# Altium PCB plc_module_xs.00001.001.PcbDoc (part 1 of 2)
Units mm, origin at the board's own origin, x right, y up, seen from the top; angles counter-clockwise.
Board outline 39 x 110 mm, 2 copper layers (Top Layer, Bottom Layer), stack 1.06 mm thick; 80 components, 57 nets, 253 pads, 58 vias.
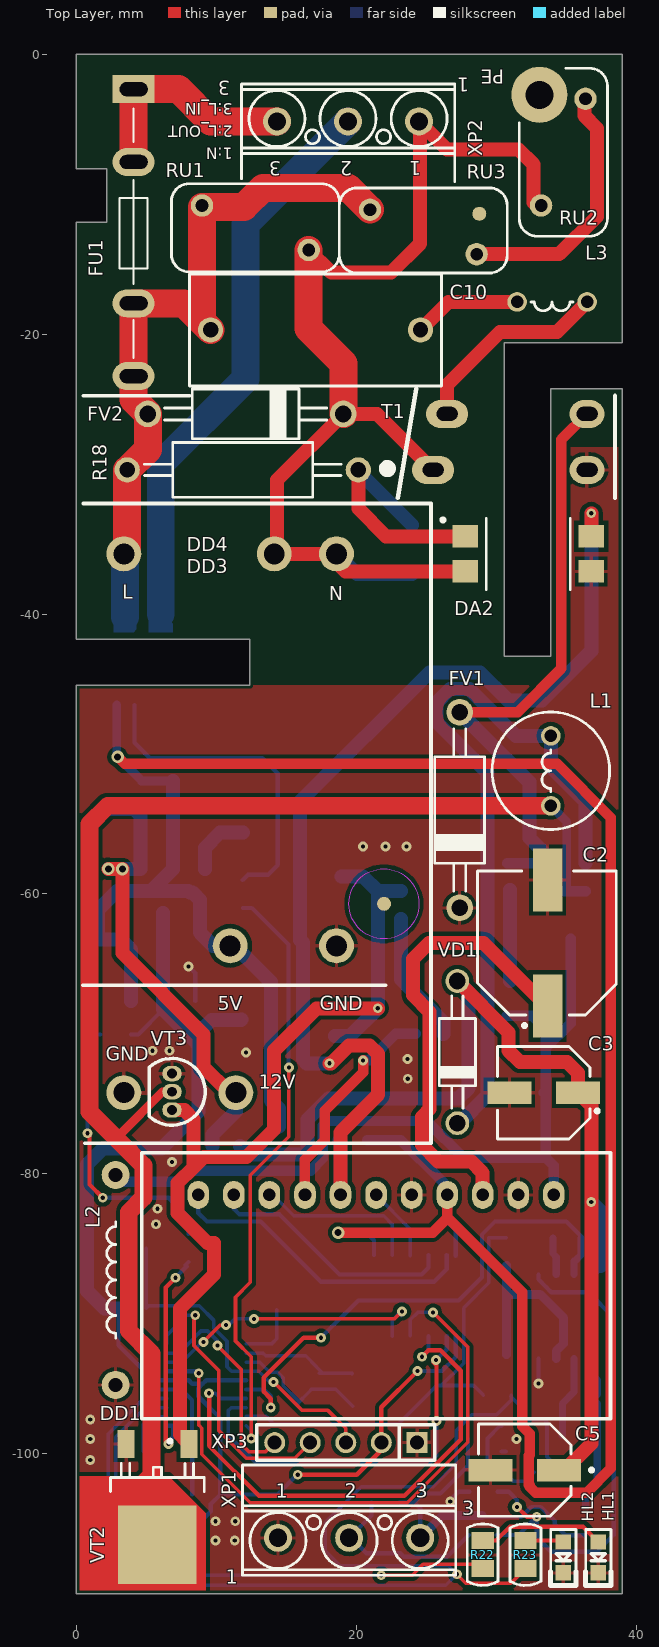
[diagram p0: Top Layer view]
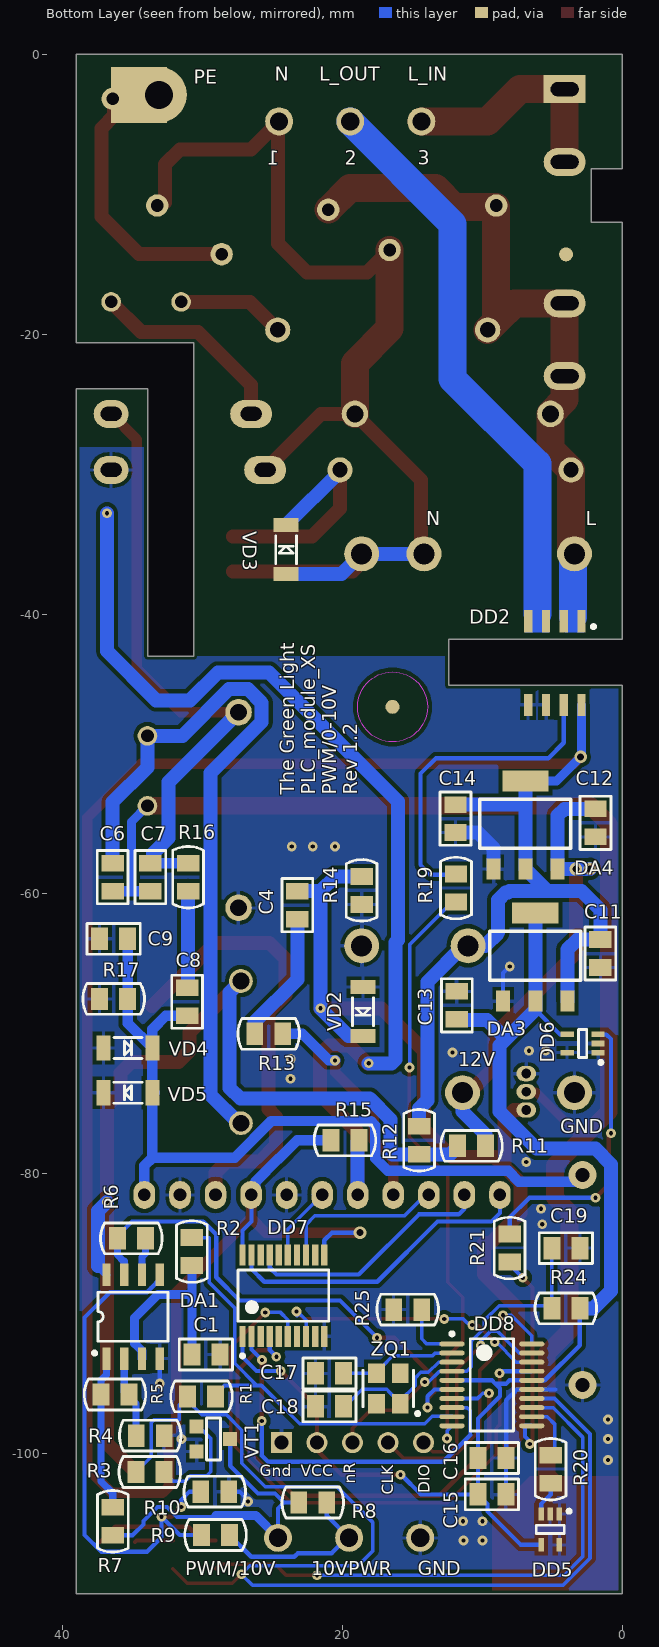
[diagram p1: Bottom Layer view, seen from below]
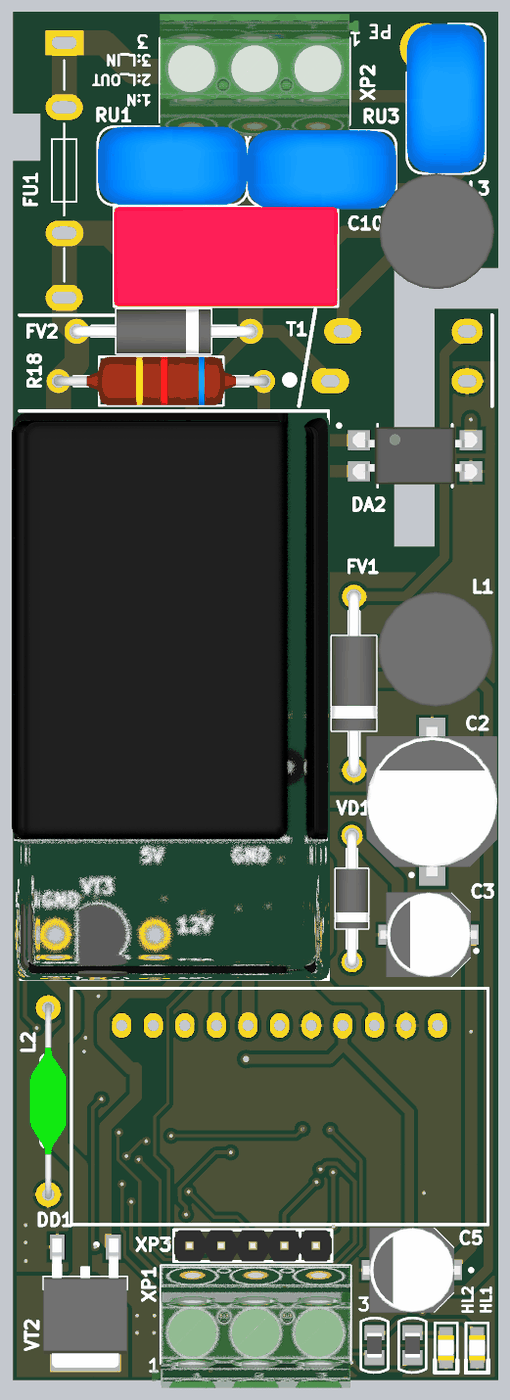
[diagram p2: 3D render of the assembled board from above, using the file's embedded part models]
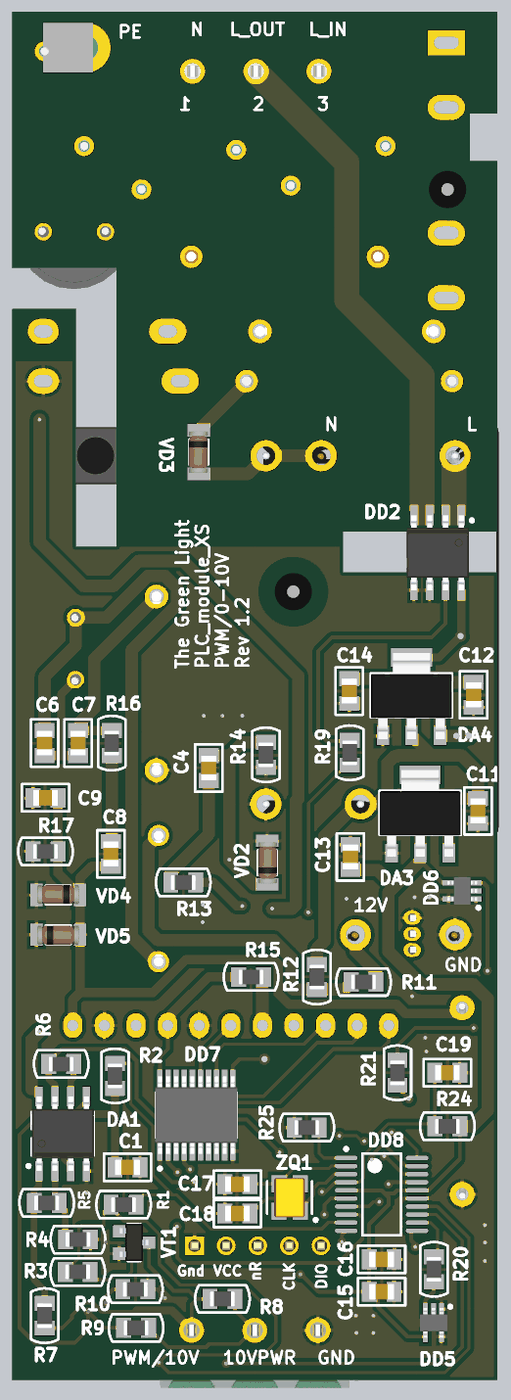
[diagram p3: 3D render of the assembled board from below, using the file's embedded part models]

## Layer stack, top to bottom
Top Solder: solder mask 0.01, Solder Resist, Dk 3.5
Top Layer: signal copper 0.03
Dielectric1: core 1, FR-4, Dk 4.2
Bottom Layer: signal copper 0.03
Bottom Solder: solder mask 0.01, Solder Resist, Dk 3.5

## Board outline
0,-110 0,-45.083 12.4,-45.083 12.4,-41.8 0,-41.8 0,-12 2.2,-12 2.2,-8.2 0,-8.2 0,0 39,0 39,-20.6 30.6,-20.6 30.6,-43 33.9,-43 33.9,-23.9 39,-23.9 39,-44.9 39,-110

## Design rules (kind name [scope] priority, off if disabled: settings)
BoardOutlineClearance [All] p1: gap=0.254 ignorepadtopadclearanceinfootprint=FALSE
Clearance Poly [InPolygon] p1: gap=0.3 ignorepadtopadclearanceinfootprint=FALSE
Clearance Clearance_1 [All] p2: gap=0.2 ignorepadtopadclearanceinfootprint=FALSE
Clearance [InNamedPolygon('Top Layer-No Net')] p3: gap=0.2 ignorepadtopadclearanceinfootprint=FALSE
Clearance All [Net And Not InPoly] p4: gap=0.2 ignorepadtopadclearanceinfootprint=FALSE
ComponentClearance ComponentClearance_1 [(InComponent('P1') OR InComponent('P2') OR InComponent('P3') OR InComponent('J1')) vs (InComponent('P1') OR InComponent('P2') OR InComponent('P3') OR InComponent('J1'))] p1: gap=0 collisioncheckmode=3 verticalgap=0 showdistances=FALSE
Height [All] p1: minheight=0 maxheight=40 prefheight=12.7
HoleSize [All] p1: absolutevalues=TRUE maxlimit=6 minlimit=0.3 maxpercent=80.000 minpercent=20.000
MinimumAnnularRing [All] p1: minimumring=0.2
MinimumSolderMaskSliver [All] p1: minsoldermaskwidth=0.1
PlaneClearance [All] p1: clearance=0.75
PlaneConnect [All] p1: pad.planeconnectstyle=Relief pad.reliefexpansion=0.508 pad.reliefentries=4 pad.reliefconductorwidth=0.254 pad.reliefairgap=0.2 via.planeconnectstyle=Direct via.reliefexpansion=0.508 via.reliefentries=4 via.reliefconductorwidth=0.254 via.reliefairgap=0.2
PolygonConnect [All] p1: thpad.connectstyle=Relief thpad.reliefconductorwidth=0.254 thpad.reliefentries=4 thpad.polygonreliefangle="90 Angle" thpad.airgapwidth=0.254 smdpad.connectstyle=Relief smdpad.reliefconductorwidth=0.254 smdpad.reliefentries=4 smdpad.polygonreliefangle="90 Angle" smdpad.airgapwidth=0.254 via.connectstyle=Direct via.reliefconductorwidth=0.254 via.reliefentries=4 via.polygonreliefangle="90 Angle" via.airgapwidth=0.254
RoutingTopology [All] p1: topology=Daisy_Balanced
RoutingVias [All] p1: holewidth=0.3 width=0.7 viastyle="Through Hole" minholewidth=0.3 minwidth=0.7 maxholewidth=2 maxwidth=3
SilkToSilkClearance [All] p1: silktosilkclearance=0.2
SilkToSolderMaskClearance [IsPad] p1: minsilkscreentomaskgap=0.1 clearancetoexposedcopper=TRUE
SolderMaskExpansion [All] p1: expansion=0.05
Width [All] p1: maxlimit=4 minlimit=0.125 preferedwidth=0.254
21 further rules are at their usual default settings.

## Components (designator, comment, footprint, x,y, rotation, side; value= is the part's Value field where it differs from the comment)
C1 "1uF" C0805 29.734,-92.9 r0 bottom
C2 "EEEFK1E471P" CAPAE1030X1020N 33.678,-63.5 r90 top value=470uF
C3 "EEEFK1E470P" CAPAE660X540N 33.4,-74.2 r180 top value=47uF
C4 "330nF" C0805 23.2,-60.8 r90 bottom
C5 "EEEFK1E470P" CAPAE660X540N 32.05,-101.16 r180 top value=47uF
C6 "39nF" C0805 36.4,-58.8 r90 bottom
C7 "330nF" C0805 33.7,-58.8 r90 bottom
C8 "1500pF" C0805 31.069,-67.7 r270 bottom
C9 "4700pF" C0805 36.326,-63.2 r0 bottom
C10 "B32652A104J" CAPR1500-800X1800X1500 17.1,-19.7 r180 top value=100nF
C11 "22uF" C0805 1.555,-64.254 r90 bottom
C12 "22uF" C0805 1.9,-54.918 r90 bottom
C13 "10uF" C0805 11.809,-67.954 r270 bottom
C14 "10uF" C0805 11.9,-54.618 r90 bottom
C15 "0.1uF" C0805 9.3,-102.9 r180 bottom
C16 "0.1uF" C0805 9.3,-100.3 r0 bottom
C17 "12pF" C0805 20.9,-94.255 r180 bottom
C18 "12pF" C0805 20.9,-96.611 r180 bottom
C19 "0.1uF" C0805 4.015,-85.3 r0 bottom
DA1 "LM258DR" SOIC-8 34.934,-90.2 r180 bottom
DA2 "FOD817BS" SMD-4 32.3,-35.7 r270 top
DA3 "LM1117-Series" SOT-223 6.2,-64.4 r180 bottom value=LM1117MPX-3.3
DA4 "LM1117-Series" SOT-223 6.9,-54.968 r180 bottom value=LM1117MPX-5.0
DD1 "KQ-330F" KQ-330F 21.425,-81.5 r180 top
DD2 "ACS723LLCTR-05AB-T" SOIC-8 4.8,-43.5 r0 bottom
DD3 "IRM-05-12" IRM-05-12 -0.05,-32.1 r90 top locked
DD4 "IRM-02-5" IRM-02-5 -0.1,-32.85 r90 top locked
DD5 "LMT84DCKT" SOT65P210X110-5N 5.133,-105.4 r270 bottom
DD6 "LMT84DCKT" SOT65P210X110-5N 2.822,-70.681 r0 bottom
DD7 "ST2378ETTR" SOP65P640X120-20N 24.2,-88.7 r90 bottom
DD8 "STM32F031F6P6TR" STM-TSSOP20_N 9.3,-95.073 r180 bottom
FU1 "Fuse" F-W20.0/E5.0 4.1,-13.5 r270 top value=FH-100
FV1 "P6KE24CA" DO-15 27.4,-54.001 r90 top
FV2 "P6KE440CA" DO-15 12.1,-25.7 r180 top
HL1 "KP-2012SURCK" LD0805 37.3,-107.4 r270 top
HL2 "DO NOT PLACE" LD0805 34.8,-107.4 r270 top value=KP-2012SGC
L1 "RLB0914-680KL" RLB0914_BOURNS 33.909,-51.2 r90 top value=68uH
L2 "EC24-221K" EC24 2.822,-87.573 r90 top value=220uH
L3 "RCH895NP-150K" RLB0914_BOURNS 34,-17.7 r180 top value=15uH
R1 "Resistor" R0805 30.045,-95.9 r0 bottom value=0
R2 "10k" R0805 30.734,-85.55 r90 bottom
R3 "Resistor" R0805 33.737,-101.3 r180 bottom value=0
R4 "10k" R0805 33.712,-98.7 r180 bottom
R5 "27k" R0805 36.229,-95.76 r0 bottom
R6 "100k" R0805 35.059,-84.6 r180 bottom
R7 "0" R0805 36.387,-104.821 r270 bottom
R8 "100k" R0805 22.1,-103.479 r180 bottom
R9 "270k" R0805 29.045,-105.8 r180 bottom
R10 "100k" R0805 29.1,-102.7 r0 bottom
R11 "0" R0805 10.755,-78 r0 bottom
R12 "0" R0805 14.499,-77.6 r270 bottom
R13 "27" R0805 25.247,-70 r0 bottom
R14 "2k" R0805 18.6,-59.743 r90 bottom
R15 "51k" R0805 19.8,-77.6 r0 bottom
R16 "270" R0805 31,-58.8 r90 bottom
R17 "2.7k" R0805 36.326,-67.5 r0 bottom
R18 "RSF200JB-73-220K" RES1651-1000X390 11.9,-29.7 r180 top value=220k
R19 "510" R0805 11.865,-59.577 r90 bottom
R20 "510" R0805 5.096,-101.1 r270 bottom
R21 "510" R0805 8.029,-85.3 r90 bottom
R22 "510" R0805 29.045,-107.2 r90 top
R23 "510" R0805 32.1,-107.2 r90 top
R24 "10k" R0805 4.015,-89.6 r0 bottom
R25 "1k" R0805 15.317,-89.7 r0 bottom
RU1 "B72210-S" VAR_EPCOS_B72210S0461K101 12.8,-12.4 r0 top value=S10K275
RU2 "B72210-S" VAR_EPCOS_B72210S0461K101 34.8,-7 r90 top value=S10K275
RU3 "B72210-S" VAR_EPCOS_B72210S0461K101 24.8,-12.7 r180 top value=S10K275
T1 "Coupling_Coil" KQ330COIL 31.5,-27.7 r180 top
VD1 "1N5819" DO-41 27.232,-71.3 r90 top
VD2 "LL4148" SOD-80 18.5,-68.408 r270 bottom
VD3 "LL4148" SOD-80 24,-35.4 r90 bottom
VD4 "LL4148" SOD-80 35.3,-71 r180 bottom
VD5 "LL4148" SOD-80 35.3,-74.2 r0 bottom
VT1 "BJT-NPN" SOT-23 29.2,-98.941 r270 bottom value=BC847
VT2 "MJD50T4G" DIODES-INC_TO-252-3L 5.8,-103.8 r270 top locked
VT3 "BJT-NPN" TO-92-D 7.244,-74.134 r90 top value=2SD667
XP1 "GND PWR CTRL" PHOENIX_1715734 19.5,-106 r0 top locked value=DG300-5.0-03P-12-00AH
XP2 "LIN LOUT N" PHOENIX_1715734 19.42,-4.8 r180 top value=DG128-5.0-03P-14-00AH
XP3 "SWD ОТЛАДКА" PLS-5 19.26,-99.2 r180 top value=PLS-5
ZQ1 "Crystal-1_3p" "SMD 3.2x2.5mm" 16.7,-95.329 r90 bottom value="KX-7 16.0MHz"

## Footprints (in the part's own frame and the unit in brackets; to place one, negate y for a bottom-side part, rotate by r counter-clockwise, add the part's x,y. Pads: shape width x height; smd on the part's side, far side on the other; paste and mask are expansions set on the pad)
C0805 [mm] "2012M"
  rect 1.2x1.6 smd: 1(-1,0) 2(1,0)
  silkscreen extent -1.9,-1.1 1.9,1.1, body extent -1,-0.62 1,0.63, height 1.01
CAPAE660X540N [mm] "Capacitor, Aluminium Electrolytric, 6.6mm L X 6.6mm W X 5.4mm H, IPC Medium Density"
  rect 3.15x1.6 smd: 1(-2.45,0) 2(2.45,0)
  silkscreen extent -3.95,-3.3 3.3,3.3, body extent -3.9,-3.4 3.9,3.4, height 5.7
CAPAE1030X1020N [mm] "Capacitor, Aluminium Electrolytric, 10.3mm L X 10.3mm W X 10.2mm H, IPC Medium Density"
  rect 4.5x2.1 smd: 1(-4.5,0) 2(4.5,0)
  silkscreen extent -6.02,-4.91 5.15,5, body extent -6,-5.25 6,5.25, height 10.2
CAPR1500-800X1800X1500 [mm] "Capacitor Radial, Pin spacing 15.0mm - Body With 8mm X Body Length 18mm X Body Height 15mm"
  round 1.8 hole 1.1: 1(-7.5,0) 2(7.5,0)
  silkscreen extent -9,-4 9,4, body extent -9,-4 9,4, height 15
DIODES-INC_TO-252-3L [mm] "DPAK TO-252, 2.28mm pitch; 2 pin, 9.7mm L X 6.7mm W X 2.40mm H body"
  rect 2x1.2 smd: 1(-4.5,2.25) 3(-4.5,-2.25)
  rect 5.6x5.6 smd: 2(2.7,0)
  silkscreen extent -4.82,-3.35 -1.1,3.35, body extent -5.2,-3.35 5.2,3.35, height 2.4
DO-15 [mm] "DO-15, Diode, Axial, Body 7.62 x 3.56mm (LxDia. Max), Pin spacing 13.97mm"
  round 1.9 hole 1.2: 1(-6.985,0) 2(6.985,0)
  silkscreen extent -5.8,-1.78 5.8,1.78, body extent -7.41,-1.78 7.42,1.78, height 3.56
DO-41 [mm] "DO-41, Diode, Axial, Body 4.7 x 2.7 mm (LxDia. max), Pin spacing 10.16mm"
  round 1.7 hole 1.2: 1(-5.08,0) 2(5.08,0)
  silkscreen extent -4,-1.3 4,1.3, body extent -5.48,-1.3 5.48,1.3, height 2.6
EC24 [mm]
  round 2 hole 1: 1(-7.5,0) 2(7.5,0)
  silkscreen extent -4.16,0 4.16,0.63, body extent -7.87,-1.5 7.87,1.5, height 3
F-W20.0/E5.0 [mm] "General Fuse Holder 5x20"
  rect 2x3 hole 1 slot 2 at 90 deg: 1(-11,0)
  oval 2x3 hole 1 slot 2 at 90 deg: 1(-5.8,0) 2(4.3,0) 2(9.5,0)
  silkscreen extent -9.6,-3.6 10.9,4
IRM-02-5 [mm] "MeanWell AC-DC 220 to 5V 2W (400mA)"
  round 2.5 hole 1.5: 1(-2.85,-18.7) 2(-2.85,-3.5) 3(-30.85,-11.1) 4(-30.85,-18.7)
  silkscreen extent -33.67,-22.23 -33.67,-0.58, body extent -33.7,-22.2 0,0, height 15
IRM-05-12 [mm] "MeanWell AC-DC 220 to 12V 5W (420mA)"
  round 2.5 hole 1.5: 1(-3.6,-14.2) 2(-3.6,-3.45) 3(-42.1,-11.45) 4(-42.1,-3.45)
  silkscreen extent -45.7,-25.4 0,-0.55, body extent -45.81,-25.51 -0.13,-0.13, height 21.5
KQ330COIL [mm] "KQ330COIL"
  oval 3x2 hole 1 slot 1.5 at 0 deg: 1(6,2) 2(5,-2)
  oval 2.5x2 hole 1 slot 1.5 at 0 deg: 3(-5,2) 4(-5,-2)
  silkscreen extent -7,-3.77 9.55,4, body extent -7.13,-3.75 7.38,3.75, height 15.95
KQ-330F [mm]
  oval 1.54x2 hole 0.9: 1(-12.7,0) 2(-10.16,0) 3(-7.62,0) 4(-5.08,0) 5(-2.54,0) 6(0,0) 7(2.54,0) 8(5.08,0) 9(7.62,0) 10(10.16,0) 11(12.7,0)
  silkscreen extent -16.75,-3 16.75,16, body extent -16.75,-3 16.75,16, height 13
LD0805 [mm]
  rect 1.1x1.1 smd: 1(-1.1,0) 2(1.1,0)
  silkscreen extent -2,-0.9 2,0.9, body extent -1,-0.62 1,0.63, height 0.73
PHOENIX_1715734 [mm] "Terminal Block, 17.5A 400V, Pitch 5.08mm, 3 Positions, Screw Connection"
  round 2 hole 1.3: 1(-5.08,0) 2(0,0) 3(5.08,0)
  silkscreen extent -7.62,-2.67 7.62,5.2, body extent -8.36,-4.6 7.62,5.2, height 14.19
PLS-5 [mm]
  rect 1.5x1.5 hole 1: 1(-5.08,0)
  round 1.5 hole 1: 2(-2.54,0) 3(0,0) 4(2.54,0) 5(5.08,0)
  silkscreen extent -6.35,-1.27 6.35,1.27, body extent -6.35,-1.27 6.35,1.27, height 8.9
R0805 [mm] "2012M"
  rect 1.2x1.6 smd: 1(-1,0) 2(1,0)
  silkscreen extent -2.2,-1.1 2.2,1.1, body extent -1,-0.6 1,0.6, height 0.5
RES1651-1000X390 [mm] "Resistor, Axial, Pad spacing 16.51mm - Body Lengh 10mm X Body Diameter 3.9mm"
  round 1.8 hole 1.1: 1(-8.255,0) 2(8.255,0)
  silkscreen extent -7.02,-1.95 7.02,1.95, body extent -8.64,-1.95 8.65,1.95, height 3.9
RLB0914_BOURNS [mm]
  round 1.4 hole 0.9: 1(-2.5,0) 2(2.5,0)
  silkscreen extent -4.2,-4.2 4.2,4.2, body extent -4.7,-4.7 4.6,4.6, height 10
"SMD 3.2x2.5mm" [mm]
  rect 1.4x1.2 smd paste+0: 1(-1.1,-0.85) 2(1.1,-0.85) 3(1.1,0.85) 4(-1.1,0.85)
  silkscreen extent -1.92,-2.22 1.3,1.8, body extent -1.6,-1.25 1.6,1.25, height 0.77
SMD-4 [mm]
  rect 1.6x1.8 smd: 1(-1.25,-4.5) 2(1.25,-4.5) 3(1.25,4.5) 4(-1.25,4.5)
  silkscreen extent -2.55,-6.22 2.54,3, body extent -2.29,-5 2.29,5, height 3.85
SOD-80 [mm]
  rect 1x1.8 smd: 1(-1.75,0) 2(1.75,0)
  silkscreen extent -1,-0.75 1,0.75, body extent -1.68,-0.74 1.68,0.8, height 1.52
SOIC-8 [mm] "4320.8-А Small Outline; 8 Leads; Body Width 3.9 mm; Pitch 1.27 mm"
  rect 0.6x1.6 smd: 1(-1.905,-3) 2(-0.635,-3) 3(0.635,-3) 4(1.905,-3) 5(1.905,3) 6(0.635,3) 7(-0.635,3) 8(-1.905,3)
  silkscreen extent -2.88,-2.72 2.5,1.75, body extent -2.5,-3.01 2.5,3.01, height 1.75
SOP65P640X120-20N [mm] "SOP, 20-Leads, Body 6.5x4.4mm, Pitch 0.65mm, IPC Medium Density"
  rect 1.5x0.45 smd: 1(-2.9,2.925) 2(-2.9,2.275) 3(-2.9,1.625) 4(-2.9,0.975) 5(-2.9,0.325) 6(-2.9,-0.325) 7(-2.9,-0.975) 8(-2.9,-1.625) 9(-2.9,-2.275) 10(-2.9,-2.925) 11(2.9,-2.925) 12(2.9,-2.275) 13(2.9,-1.625) 14(2.9,-0.975) 15(2.9,-0.325) 16(2.9,0.325) 17(2.9,0.975) 18(2.9,1.625) 19(2.9,2.275) 20(2.9,2.925)
  silkscreen extent -4.42,-3.25 1.83,3.25, body extent -3.12,-3.3 3.12,3.3, height 1.2
SOT65P210X110-5N [mm] "SOT353, SC70-5, SOT, 0.65mm Pitch, 5 pin, 1.25mm W X 2.00mm L X 1.10mm H, IPC Medium Density"
  rect 0.95x0.4 smd: 1(-1.1,0.65) 2(-1.1,0) 3(-1.1,-0.65) 4(1.1,-0.65) 5(1.1,0.65)
  silkscreen extent -1.42,-1 0.3,1.47, body extent -1.2,-1.1 1.2,1.1, height 1.1
SOT-23 [mm] "КТ-46"
  rect 1x1 smd: 1(-0.9,-1.2) 2(0,1.2) 3(0.9,-1.2)
  silkscreen extent -1.5,-0.5 1.5,0.5, body extent -1.5,-1.15 1.5,1.15, height 1.11
SOT-223 [mm]
  rect 1x1.5 smd: 1(-2.3,-3.25) 2(0,-3.25) 3(2.3,-3.25)
  rect 3.3x1.5 smd: 2(0,3.05)
  silkscreen extent -3.25,-1.75 3.25,1.75, body extent -3.25,-3.53 3.25,3.43, height 1.65
STM-TSSOP20_N [mm] "SOP, 20-Leads, Body 6.6x4.5mm, Pitch 0.65mm, IPC Medium Density"
  oval 1.8x0.35 smd: 1(-2.85,2.925) 2(-2.85,2.275) 3(-2.85,1.625) 4(-2.85,0.975) 5(-2.85,0.325) 6(-2.85,-0.325) 7(-2.85,-0.975) 8(-2.85,-1.625) 9(-2.85,-2.275) 10(-2.85,-2.925) 11(2.85,-2.925) 12(2.85,-2.275) 13(2.85,-1.625) 14(2.85,-0.975) 15(2.85,-0.325) 16(2.85,0.325) 17(2.85,0.975) 18(2.85,1.625) 19(2.85,2.275) 20(2.85,2.925)
  silkscreen extent -2.98,-3.3 1.55,3.77, body extent -2.25,-3.3 2.25,3.3, height 1.2
TO-92-D [mm]
  oval 1.1x1.4 hole 0.7: 1(-1.3,0.4) 2(0,0.4) 3(1.3,0.4)
  silkscreen extent -2.38,-1.97 2.38,2.02, body extent -2.4,-1.92 2.4,2.01, height 10
VAR_EPCOS_B72210S0461K101 [mm] "EPCOS S10K460 Metal Oxyde Varistor, Body 6.3X12mm"
  round 1.6 hole 0.9: 1(-3.81,1.587) 2(3.81,-1.587)
  silkscreen extent -6,-3.15 6,3.15, body extent -6,-3.15 6,3.15, height 15

## Part data
C1: library part GRM219R71E105KA88D, Dielectric Type=X7R, Manufacturer=Murata, Tolerance=±10%, Voltage=25V, Working Temperature Max=+125°С, Working Temperature Min=-55°С, Application Category=1, ID=229, Part Number=GRM219R71E105KA88D, Published=18.05.2010, Publisher="Andrew Danich", Type=Конденсатор
C2: Tolerance=20%, Voltage=25V, Distributor1=terraelectronica, Distributor2=chipdip, ESR=0.08ohm, ID=1, Part Number=EEEFK1E471P, Published=23.04.2010, Publisher="Andrew Danich", Type=Конденсатор, URL1="<div><a href=\"https://www.terraelectronica.ru/product/310291\">https://www.terraelectronica.ru/product/310291</a></div>", URL2=https://www.chipdip.ru/product1/8000425032
C3 C5: Manufacturer=PANASONIC, Tolerance=20%, Voltage=25V, Distributor1=terraelectronica, ID=4, Part Number=EEEFK1E470P, Published=23.04.2010, Publisher="Andrew Danich", Type=Конденсатор, URL1="<div><a href=\"https://www.terraelectronica.ru/product/577701\">https://www.terraelectronica.ru/product/577701</a></div>"
C4 C7: library part CC0805KKX7R9BB334, Dielectric Type=X7R, Manufacturer=Yageo, Tolerance=±10%, Voltage=50V, Working Temperature Max=+125°С, Working Temperature Min=-55°С, Application Category=1, Distributor1=Terraelectronica, ID=235, Part Number=CC0805KKX7R9BB334, Published=18.05.2010, Publisher="Andrew Danich", Type=Конденсатор, URL1="<div><a href=\"https://www.terraelectronica.ru/product/1078481\">https://www.terraelectronica.ru/product/1078481</a></div>"
C6: library part CC0805KRX7R9BB393, Dielectric Type=X7R, Manufacturer=Yageo, Tolerance=±5%, Voltage=50V, Working Temperature Max=+125°С, Working Temperature Min=-55°С, Application Category=1, Distributor1=Terraelectronica, ID=234, Part Number=CC0805KRX7R9BB393, Published=18.05.2010, Publisher="Andrew Danich", Type=Конденсатор, URL1="<div><a href=\"https://www.terraelectronica.ru/product/1080422\">https://www.terraelectronica.ru/product/1080422</a></div>"
C8: library part CC0805JRNPO9BN152, Dielectric Type=NP0, Manufacturer=Yageo, Tolerance=±5%, Voltage=50V, Working Temperature Max=+125°С, Working Temperature Min=-55°С, Application Category=1, Distributor1=Terraelectronica, ID=236, Part Number=CC0805JRNPO9BN152, Published=18.05.2010, Publisher="Andrew Danich", Type=Конденсатор
C9: library part CC0805JKNPO9BN472, Dielectric Type=NP0, Manufacturer=Murata, Tolerance=±5%, Voltage=50V, Working Temperature Max=+125°С, Working Temperature Min=-55°С, Application Category=1, ID=233, Part Number=CC0805JKNPO9BN472, Published=18.05.2010, Publisher="Andrew Danich", Type=Конденсатор
C10: Manufacturer="EPCOS AG", Tolerance=5%, Voltage=1000V, Distributor1=terraelectronica, Distributor2=chipdip, Functional Analog="К73-17 имп, 0.1 мкФ, 1000 В, 5%  B32652A0104J", ID=1, Part Number=B32652A104J, Published=18.05.2010, Publisher="Andrew Danich", Type=Конденсатор, URL1="<div><a href=\"https://www.terraelectronica.ru/product/608082\">https://www.terraelectronica.ru/product/608082</a></div>", URL2=https://www.chipdip.ru/product/b32652a0104j000
C11 C12: library part GRM21BR61E226ME44L, Dielectric Type=X5R, Manufacturer=Murata, Tolerance=±20%, Voltage=25V, ID=39, Part Number=GRM21BR61E226ME44L, Published=18.05.2010, Publisher="Andrew Danich", Type=Конденсатор
C13 C14: library part GRM21BR61E106KA73L, Dielectric Type=X5R, Manufacturer=Murata, Tolerance=±10%, Voltage=25V, ID=53, Part Number=GRM21BR61E106KA73L, Published=18.05.2010, Publisher="Andrew Danich", Type=Конденсатор
C15 C16 C19: library part GRM21BR71H104KA01L, Dielectric Type=X7R, Manufacturer=Murata, Tolerance=±10%, Voltage=50V, Working Temperature Max=+125°С, Working Temperature Min=-55°С, Application Category=1, ID=138, Part Number=GRM21BR71H104KA01L, Published=18.05.2010, Publisher="Andrew Danich", Type=Конденсатор
C17 C18: library part CC0805JRNPO9BN120, Dielectric Type=NP0, Manufacturer=Yageo, Tolerance=±5%, Voltage=50V, Working Temperature Max=+125°С, Working Temperature Min=-55°С, Application Category=1, Distributor1=Terraelectronica, ID=239, Part Number=CC0805JRNPO9BN120, Published=18.05.2010, Publisher="Andrew Danich", Type=Конденсатор
DA1: Supply Current=1.2mA, Bandwidth=0.7MHz, ID=65, Part Number=LM258DR, Published=08.12.2013, Publisher="Andrew Danich", Rail-to-Rail=-\-, Slew Rate=0.3V/µs, Supply Operation=+3…32V, Type=Микросхема
DA2: Current Transfer Ratio=50…600%, Cut-off Frequency=80kHz, Input Current=20mA, Input Voltage=1.2V, Output Current=50mA, Output Voltage=35V, Total Power Dissipation=150mW, Application Category=1, ID=15, Part Number=FOD817BS, Published=09.01.2017, Publisher="Andrew Danich", Type=Микросхема
DA3: library part LM1117MPX-3.3, Input Voltage=+8.5…20V, Output Current=800mA, Output Voltage=+3.3V, ID=9, Part Number=LM1117MPX-3.3, Published=13.08.2015, Publisher="Andrew Danich", Type=Микросхема
DA4: library part LM1117MPX-5.0, Input Voltage=+8.5…20V, Output Current=800mA, Output Voltage=+3.3V, Distributor1=terraelectronica, Distributor2=chipdip, ID=16, Part Number=LM1117MPX-5.0, Published=13.08.2015, Publisher="Andrew Danich", Type=Микросхема, URL1="<div><a href=\"https://www.terraelectronica.ru/product/133540\">https://www.terraelectronica.ru/product/133540</a></div>", URL2=https://www.chipdip.ru/product/lm1117mpx-5.0-nopb
DD1: Manufacturer=kq100.com, Application Type=Transceiver, Data Rate=1200bps, Distributor1=Alibaba, Distributor2=Taobao, Functional Analog=-, ID=1, Input Interface=UART, Input Speed=9600baud, Part Number=KQ-330F, Published=18.08.2014, Publisher="Andrew Danich", Type=Микросхема
DD3: Input Voltage=+12V, Manufacturer="Mean Well (MW)", Output Current=420mA, Power=5W, Working Temperature Max=+70C, Working Temperature Min=-30C, Distributor1=Terraelectronica, ID=2, Output Voltage=+12V, Part Number=IRM-05-12, URL1="<div><a href=\"https://www.terraelectronica.ru/product/1202359\">https://www.terraelectronica.ru/product/1202359</a></div>"
DD4: Manufacturer="Mean Well (MW)", Output Current=400mA, Output Voltage=+5V, Power=2W, Voltage Tolerance=±2,5%, Working Temperature Max=+70C, Working Temperature Min=-30C, Distributor1=Terraelectronica, ID=17, Part Number=IRM-02-5, URL1="<div><a href=\"https://www.terraelectronica.ru/product/2118699\">https://www.terraelectronica.ru/product/2118699</a></div>"
DD5 DD6: "LMT84/LMT84-Q1 1.5V, SC70/TO-92/TO-126,Analog Temperature Sensors with Class-AB Output", Manufacturer="Texas Instruments", Distributor1=terraelectronica, ID=9, Part Number=LMT84DCKT, URL1="<div><a href=\"https://www.terraelectronica.ru/product/1196420\">https://www.terraelectronica.ru/product/1196420</a></div>"
DD7: "8-bit dual supply 1.71 V to 5.5 V level translator with I/O VCC ±15 kV ESD protection", Input Voltage="1.7V to 5.5V", Manufacturer=STMicroelectronics, Distributor1=terraelectronica, ID=8, Part Number=ST2378ETTR, Published=18.08.2014, Publisher="Andrew Danich", Type=Микросхема, URL1="<div><a href=\"https://www.terraelectronica.ru/product/448973\">https://www.terraelectronica.ru/product/448973</a></div>"
DD8: Manufacturer=STMicroelectronics, Operation Frequency=48MHz, Working Temperature Max=+85°С, Working Temperature Min=-40°С, Application Category=1, Distributor1=Terraelectronica, Distributor2=ChipDip, EEPROM=-, Flash=32K, I/O Lines=15, ID=29, Part Number=STM32F031F6P6TR, Prog Interface=SWD, Published=27.07.2015, Publisher="Andrew Danich", SRAM=4K, Supply Operation=+2.4…3.6V, Type=Микросхема, URL1=https://www.terraelectronica.ru/product/2176678
FU1: library part FH-100, ID=17, Part Number=FH-100, Published=24.09.2010, Publisher="Andrew Danich", Type="Вставка плавкая"
FV1: "Suppressor-Bi", Reverse Current=100A, Reverse Voltage=20.5V, Total Power Dissipation=0, ID=1, Part Number=P6KE24CA, Published=27.07.2015, Publisher="Andrew Danich", Type=Супрессор
FV2: Reverse Current=100A, Reverse Voltage=376V, Total Power Dissipation=600W, Distributor1=Terraelectronica, Distributor2=ChipDip, Distributor3=Compel, ID=16, Part Number=P6KE440CA, Published=27.07.2015, Publisher="Andrew Danich", Type=Супрессор
HL1: Color=Red, Forward Current=30mA, Forward Voltage=2.5V, Manufacturer=Kingbright, Power Dissipation=75mW, Working Temperature Max=+85°С, Working Temperature Min=-40°С, Application Category=1, ID=23, Leds=1, Luminous Flux=150, Part Number=KP-2012SURCK, Published=03.12.2013, Publisher="Andrew Danich", Type="Индикатор единичный"
HL2: library part KP-2012SGC, Color=Green, Forward Current=25mA, Forward Voltage=2.5V, Manufacturer=Kingbright, Power Dissipation=62.5mW, Working Temperature Max=+85°С, Working Temperature Min=-40°С, Application Category=1, ID=21, Leds=1, Part Number=KP-2012SGC, Published=03.12.2013, Publisher="Andrew Danich", Type="Индикатор единичный"
L1: DC Resistance=0.2Ohm, Rated Current=1200mA, Self-Resonant Frequency=4.5MHz, Tolerance=10%, ID=9, Part Number=RLB0914-680KL, Published=20.05.2010, Publisher="Andrew Danich", Q=30, Type=Дроссель
L2: DC Resistance=5.7Ohm, Rated Current=130mA, Self-Resonant Frequency=4MHz, Tolerance=10%, Distributor1=ChipDip, ID=8, Part Number=EC24-221K, Published=20.05.2010, Publisher="Andrew Danich", Q=60, Type=Дроссель, URL1="<div><a href=\"https://www.chipdip.ru/product/ec24-221k\">https://www.chipdip.ru/product/ec24-221k</a></div>"
L3: DC Resistance=0.05Ohm, Rated Current=1.8A, Tolerance=10%, Distributor2=terraelectronica, ID=11, Part Number=RCH895NP-150K, Published=20.05.2010, Publisher="Andrew Danich", Type=Дроссель, URL2=https://www.terraelectronica.ru/product/213295
R1 R3 R11 R12: library part RC0805JR-070RL, Limit Voltage=150V, Manufacturer=Yageo, Temperature Coefficient=100ppm, Tolerance=±5%, Total Power Dissipation=0.125W, Working Temperature Max=+155°С, Working Temperature Min=-55°С, Application Category=1, ID=421, Part Number=RC0805JR-070RL, Published=24.03.2010, Publisher="Andrew Danich", Series Type=Thick-Film, Type=Резистор
R2 R4 R24: library part RC0805JR-0710KL, Limit Voltage=150V, Manufacturer=Yageo, Temperature Coefficient=100ppm, Tolerance=±5%, Total Power Dissipation=0.125W, Working Temperature Max=+155°С, Working Temperature Min=-55°С, Application Category=1, ID=99, Part Number=RC0805JR-0710KL, Published=24.03.2010, Publisher="Andrew Danich", Series Type=Thick-Film, Type=Резистор
R5: library part RC0805JR-0727KL, Limit Voltage=150V, Manufacturer=Yageo, Temperature Coefficient=100ppm, Tolerance=±5%, Total Power Dissipation=0.125W, Working Temperature Max=+155°С, Working Temperature Min=-55°С, Application Category=1, ID=127, Part Number=RC0805JR-0727KL, Published=24.03.2010, Publisher="Andrew Danich", Series Type=Thick-Film, Type=Резистор
R6 R8 R10: library part RC0805JR-07100KL, Limit Voltage=150V, Manufacturer=Yageo, Temperature Coefficient=100ppm, Tolerance=±5%, Total Power Dissipation=0.125W, Working Temperature Max=+155°С, Working Temperature Min=-55°С, Application Category=1, ID=98, Part Number=RC0805JR-07100KL, Published=24.03.2010, Publisher="Andrew Danich", Series Type=Thick-Film, Type=Резистор
R7: library part RC0805JR-0727RL, Limit Voltage=150V, Manufacturer=Yageo, Part Number=RC0805JR-070RL, Temperature Coefficient=100ppm, Tolerance=±5%, Total Power Dissipation=0.125W, Working Temperature Max=+155°С, Working Temperature Min=-55°С, Application Category=1, ID=125, Published=24.03.2010, Publisher="Andrew Danich", Series Type=Thick-Film, Type=Резистор
R9: library part RC0805JR-07270KL, Limit Voltage=150V, Manufacturer=Yageo, Temperature Coefficient=100ppm, Tolerance=±5%, Total Power Dissipation=0.125W, Working Temperature Max=+155°С, Working Temperature Min=-55°С, Application Category=1, ID=126, Part Number=RC0805JR-07270KL, Published=24.03.2010, Publisher="Andrew Danich", Series Type=Thick-Film, Type=Резистор
R13: library part RC0805JR-0727RL, Limit Voltage=150V, Manufacturer=Yageo, Temperature Coefficient=100ppm, Tolerance=±5%, Total Power Dissipation=0.125W, Working Temperature Max=+155°С, Working Temperature Min=-55°С, Application Category=1, ID=125, Part Number=RC0805JR-0727RL, Published=24.03.2010, Publisher="Andrew Danich", Series Type=Thick-Film, Type=Резистор
R14: library part RC0805JR-072KL, Limit Voltage=150V, Manufacturer=Yageo, Temperature Coefficient=100ppm, Tolerance=±5%, Total Power Dissipation=0.125W, Working Temperature Max=+155°С, Working Temperature Min=-55°С, Application Category=1, ID=129, Part Number=RC0805JR-072KL, Published=24.03.2010, Publisher="Andrew Danich", Series Type=Thick-Film, Type=Резистор
R15: library part RC0805JR-0751KL, Limit Voltage=150V, Manufacturer=Yageo, Temperature Coefficient=100ppm, Tolerance=±5%, Total Power Dissipation=0.125W, Working Temperature Max=+155°С, Working Temperature Min=-55°С, Application Category=1, ID=154, Part Number=RC0805JR-0751KL, Published=24.03.2010, Publisher="Andrew Danich", Series Type=Thick-Film, Type=Резистор
R16: library part RC0805JR-07270RL, Limit Voltage=150V, Manufacturer=Yageo, Temperature Coefficient=100ppm, Tolerance=±5%, Total Power Dissipation=0.125W, Working Temperature Max=+155°С, Working Temperature Min=-55°С, Application Category=1, ID=446, Part Number=RC0805JR-07270RL, Published=24.03.2010, Publisher="Andrew Danich", Series Type=Thick-Film, Type=Резистор
R17: library part RC0805JR-072K7L, Limit Voltage=150V, Manufacturer=Yageo, Temperature Coefficient=100ppm, Tolerance=±5%, Total Power Dissipation=0.125W, Working Temperature Max=+155°С, Working Temperature Min=-55°С, Application Category=1, Distributor1=Terraelectronica, Distributor2=ChipDip, ID=442, Part Number=RC0805JR-072K7L, Published=24.03.2010, Publisher="Andrew Danich", Series Type=Thick-Film, Type=Резистор, URL1="<div><a href=\"https://www.terraelectronica.ru/product/558399\">https://www.terraelectronica.ru/product/558399</a></div>", URL2=https://www.chipdip.ru/product0/8715864745
R18: Limit Voltage=500V, Tolerance=5%, Total Power Dissipation=1W, Distributor1=chipdip, ID=3, Part Number=RSF200JB-73-220K, Published=19.09.2014, Publisher="Andrew Danich", Series Type=CF-100, Type=Резистор
R19 R20 R21 R22 R23: library part RC0805JR-07510RL, Limit Voltage=150V, Manufacturer=Yageo, Temperature Coefficient=100ppm, Tolerance=±5%, Total Power Dissipation=0.125W, Working Temperature Max=+155°С, Working Temperature Min=-55°С, Application Category=1, ID=153, Part Number=RC0805JR-07510RL, Published=24.03.2010, Publisher="Andrew Danich", Series Type=Thick-Film, Type=Резистор
R25: library part RC0805JR-071KL, Limit Voltage=150V, Manufacturer=Yageo, Temperature Coefficient=100ppm, Tolerance=±5%, Total Power Dissipation=0.125W, Working Temperature Max=+155°С, Working Temperature Min=-55°С, Application Category=1, ID=112, Part Number=RC0805JR-071KL, Published=24.03.2010, Publisher="Andrew Danich", Series Type=Thick-Film, Type=Резистор
RU1 RU2 RU3: library part "B72210-S 271-K101", "B72210-S 271-K101", Max Continuous voltage (RMS)=275V, Max non-repetitve surge current=2500A, Varistor voltage at 1mA=430V, Absorption energy=43J, Distributor1=chipdip, Distributor2=terraelectronica, ID=4, Part Number="B72210-S 271-K101", URL1="<div><a href=\"https://www.chipdip.ru/product/b72210-s271-k101\">https://www.chipdip.ru/product/b72210-s271-k101</a></div>"
T1: library part KQ330_Coupling_Coil, "Power Line Communication Coupling Transformer", Published=06.04.2010, Publisher="Viktor Klishin", Type=Трансформатор
VD1: Forward Current=1A, Forward Voltage=0.55V, Manufacturer="ST Microelectronics", Reverse Current=0.5mA, Reverse Voltage=50V, Application Category=1, Distributor1=terraelectronica, Distributor2=chipdip, ID=1, Part Number=1N5819, Published=18.05.2010, Publisher="Andrew Danich", Type=Диод, URL1="<div><a href=\"https://www.terraelectronica.ru/product/343651\">https://www.terraelectronica.ru/product/343651</a></div>", URL2=https://www.chipdip.ru/product/1n5819-2
VD2 VD3 VD4 VD5: Capacitance=4pF, Forward Current=200mA, Forward Voltage=1V, Reverse Current=3uA, Reverse Voltage=100V, Total Power Dissipation=0.5W, ID=1, Part Number=LL4148, Published=18.05.2010, Publisher="Andrew Danich", Recovery Time=4nS, Type=Диод
VT1: library part BC847, C-E Saturation Voltage=0.6V, C-E Voltage=45V, Collector Current=100mA, DC Current Gain=110…800, Total Power Dissipation=250mW, Transition Frequency=100MHz, ID=1, Part Number=BC847, Published=07.05.2013, Publisher="Andrew Danich", Type=Транзистор
VT2: "BJT-NPN", C-E Saturation Voltage=1.0V, C-E Voltage=40V, Collector Current=1A, DC Current Gain=10…150, Total Power Dissipation=1.56W, Transition Frequency=10MHz, Distributor1=Terraelectronica, Distributor2=ChipDip, ID=19, Part Number=MJD50T4G, Published=07.05.2013, Publisher="Andrew Danich", Type=Транзистор, URL1="<div><a href=\"https://www.terraelectronica.ru/product/259312\">https://www.terraelectronica.ru/product/259312</a></div>", URL2=https://www.chipdip.ru/product1/8861890713
VT3: library part 2SD667, C-E Saturation Voltage=1V, C-E Voltage=80V, Collector Current=1A, DC Current Gain=30…320, Manufacturer=HITACHI, Total Power Dissipation=900mW, Transition Frequency=140MHz, Working Temperature Max=+150°С, Working Temperature Min=-55°С, ID=1, Part Number=2SD667, Published=07.05.2013, Publisher="Andrew Danich", Type=Транзистор
XP1: library part DG300-5.0-03P-12-00AH, Limit Current=10A, Limit Voltage=300V, Resistance=20mohm, Working Temperature Max=+105°С, Working Temperature Min=-40°С, Connector Type=Female, Distributor1=terraelectronica, ID=97, Part Number=DG300-5.0-03P-12-00AH, Pins=3, Pitch=5mm, Published=07.03.2013, Publisher="Andrew Danich", Type=Вилка, URL1="<div><a href=\"https://www.terraelectronica.ru/product/988120\">https://www.terraelectronica.ru/product/988120</a></div>"
XP2: library part DG128-5.0-03P-14-00AH, Limit Current=10A, Limit Voltage=300V, Resistance=20mohm, Working Temperature Max=+105°С, Working Temperature Min=-40°С, Connector Type=Female, ID=96, Part Number=DG128-5.0-03P-14-00AH, Pins=2, Pitch=5mm, Published=07.03.2013, Publisher="Andrew Danich", Type=Вилка
XP3: library part PLS-5, Limit Current=3A, Limit Voltage=250V, Resistance=15momh, Connector Type=Male, ID=4, Part Number=PLS-5, Pins=5, Pitch=2.54mm, Published=07.03.2013, Publisher="Andrew Danich", Surface Finish=Gold, Type=Вилка
ZQ1: library part "KX-7 16.0MHz", Load Capacitance=10pF, Manufacturer="GEYER ELECTRONIC", Output Frequency=16МГц, Temperature Coefficient=±30ppm, Working Temperature Max=+70°С, Working Temperature Min=-20°С, Application Category=1, Distributor1=terraelectronica, Functional Analog=-, ID=27, Part Number="KX-7 16.0MHz", Published=12.09.2014, Publisher="Andrew Danich", Type=Резонатор, URL1="<div><a href=\"https://www.terraelectronica.ru/product/165772\">https://www.terraelectronica.ru/product/165772</a></div>"
DD2: ID=6, Part Number=ACS723LLCTR-05AB-T, Published=13.08.2015, Publisher="Andrew Danich", Type=Микросхема

## Free pads (board coordinates)
  round 1 smd far side mask+1: 6(4,-14.3) 6(16.401,-46.627)
  round 1 smd mask+1: 6(22,-60.7) 6(28.8,-11.4)
  round 4 hole 2: 8(33.095,-2.9)
  rect 4x4 smd far side: 9(34.5,-2.9)

## Via types
v1: diameter 0.7, hole 0.3, Top Layer to Bottom Layer, tented both sides, 54 vias
v2: diameter 0.9, hole 0.5, Top Layer to Bottom Layer, tented both sides, 4 vias

## Nets (pads, with @x,y where several pads share a name; then routed paths per layer and width w, separated by ;. In a path a pad name is that pad's centre, name@x,y a point inside that pad or via, vN(x,y) a via of type N, cw(c..) or ccw(c..) an arc to the next point about the centre after c; other vN are vias at no path point)
G: pad.8 pad.9 RU2.2 RU3.1 | length 18.7
  Top Layer w1: RU3.1 34.512,-14.287 37.203,-11.597 37.203,-5.298 36.3,-4.395 RU2.2@36.3,-2.99
GL: DA2.4 DD1.7 R15.1 | length 78.3
  Top Layer w1: v1(18.1,-72.1) 18.193,-72.1 19.482,-70.811 20.947,-70.811 21.58,-71.444 21.58,-74.33 18.885,-77.025 DD1.7 ; DA2.4 v1(36.8,-32.8)
  Bottom Layer w1: v1(18.1,-72.1) 16.468,-72.1 16.2,-71.832 16.2,-63.473 16,-63.273 16,-53.4 25.234,-44.166 28.866,-44.166 30.859,-46.159 33.286,-46.159 36.8,-42.645 v1(36.8,-32.8) ; R15.1 18.885,-77.685 DD1.7
GND: C1.1 C2.2 C3.2 C5.2 C9.2 C11.1 C12.1 C13.1 C14.1 C15.2 C16.1 C17.1 C18.1 C19.1 DA1.4 DA2.3 DA3.1 DA4.1 DD1.2 DD1.5 DD2.5 DD2.6 DD3.4 DD4.4 DD5.1 DD5.2 DD5.5 DD6.1 DD6.2 DD6.5 DD7.10 DD8.15 FV1.1 HL1.2 HL2.2 L2.1 R4.2 R10.1 R14.1 R17.2 R25.2 T1.3 VD2.1 VD4.1 VD5.2 VT1.3 VT2.3 VT3.3 XP1.1 XP3.1 | length 21.7
  Bottom Layer w0.305: 4.769,-95.398 DD8.15 7.511,-95.398 8.279,-96.166 8.279,-100.279 C16.1 C15.2 ; v1(8.029,-65.182) 8.5,-65.654 DA3.1 ; v1(26.722,-103.4) 26.722,-103.31 27.333,-102.7 R10.1 ; VT1.3 VT1.3@30.686,-99.841 ; v1(33.029,-94.971) DA1.4
  Bottom Layer w1: DA4.1 9.2,-56.7 10.282,-55.618 C14.1
  other v1: 9.961,-106.2 11.329,-106.2 9.961,-104.821 11.366,-104.821 1.01,-100.431 1,-98.941 31.467,-98.943 1,-97.541 5.705,-83.59 5.8,-82.486 6.844,-79.146 23.681,-73.2 23.67,-71.8 12.123,-71.318 5.456,-71.2 6.656,-71.2 20.5,-56.6 22.1,-56.6 23.6,-56.6
NetC1_2: C1.2 DA1.3 R2.1 | length 14.3
  Bottom Layer w0.635: C1.2 30.734,-88.61 ; R2.1 30.734,-88.61 ; DA1.3 34.299,-92.638 34.822,-92.115 34.822,-90.283 33.149,-88.61 30.734,-88.61
NetC2_1: C2.1 DD1.3 | length 32.6
  Top Layer w1: DD1.3 29.045,-79.917 28.228,-79.1 25.867,-79.1 24.712,-77.946 24.712,-75.919 25.257,-75.374 25.257,-68.421 24.057,-67.221 24.057,-64.636 25.194,-63.5 29.098,-63.5 C2.1@33.598,-68
NetC4_1: C4.1 R13.2 | length 9.5
  Bottom Layer w1: C4.1 23.2,-66.1 26.247,-69.147 R13.2
NetC4_2: C4.2 R14.2 VD2.2 VT2.1 VT3.1 | length 66.4
  Top Layer w1: VT3.1 7.72,-75.434 8.383,-76.096 8.383,-79.533 ; VT2.1 7.655,-98.905 7.655,-98.863 7.419,-98.626 7.419,-89.619 9.857,-87.181 9.857,-84.94 9.389,-84.94 7.25,-82.802 7.25,-80.659 8.376,-79.533 8.383,-79.533 ; 8.244,-79.672 8.383,-79.533 ; v1(21.546,-68.171) 17.171,-68.171 14.142,-71.2 14.142,-72.837 14.147,-72.842 14.147,-76.815 12.162,-78.8 9.116,-78.8 8.383,-79.533
  Bottom Layer w1: VD2.2 19.558,-70.158 v1(21.546,-68.171) 21.546,-59.8 ; R14.2@18.957,-58.743 20.489,-58.743 21.546,-59.8 ; C4.2 21.546,-59.8
NetC6_1: C6.1 C7.1 L1.1 VT2.2 VT3.2 | length 104.4
  Top Layer w0.635: 3.1,-77.7 3.1,-77.2 6.166,-74.134 VT3.2 ; 3.595,-78.195 4.083,-78.195
  Top Layer w1.27: VT2.2 4.1,-104.8 4.1,-102.824 5.384,-101.541 5.384,-92.833 3.756,-91.205 3.756,-82.736 4.8,-81.692 4.8,-79.4 3.595,-78.195 3.1,-77.7 0.951,-75.551 0.951,-55.006 2.257,-53.7 L1.1
  Bottom Layer w0.635: L1.1 35.05,-54.841 35.05,-59.8
  Bottom Layer w0.75: C7.1@33.5,-59.8 C7.1 35.05,-59.8 C6.1
NetC6_2: C6.2 L1.2 VD1.1 | length 52.5
  Bottom Layer w1: VD1.1@27.373,-76.38 29.4,-74.353 29.4,-51.35 26.722,-48.671 26.714,-48.671 25.745,-47.702 25.745,-46.338 26.717,-45.366 28.083,-45.366 31.417,-48.7 L1.2 33.909,-50.953 36.4,-53.444 C6.2
NetC7_2: C7.2 FV1.2 R16.2 T1.4 | length 43.5
  Top Layer w0.75: FV1.2 31.543,-47.016 34.67,-43.889 34.67,-27.53 T1.4
  Bottom Layer w0.75: R16.2@30.8,-57.8 R16.2 C7.2@33.5,-57.8
  Bottom Layer w1: FV1.2 32.4,-52.016 32.4,-56 33.5,-57.1 C7.2@33.5,-57.8
NetC8_1: C8.1 R16.1 | length 6.5
  Bottom Layer w1: C8.1@31,-66.2 R16.1@31,-59.7
NetC8_2: C8.2 C9.1 DD1.1 L2.2 R17.1 VD4.2 VD5.1 | length 60.4
  Bottom Layer w0.75: L2.2@2.432,-80.073 2.9,-79.605 2.9,-80.545 7.371,-80.545 8.136,-79.78 16.74,-79.78 17.625,-78.895 17.625,-78.645 17.62,-78.64 17.62,-76.56 17.96,-76.22 25.05,-76.22 27.68,-78.85 33.55,-78.85 ; C8.2@30.773,-68.7 C8.2 32.6,-68.7 33.55,-69.65 VD4.2 ; VD5.1@33.4,-74.2 33.55,-74.05 VD4.2 ; VD5.1 33.55,-78.85 ; DD1.1 34.125,-79.425 33.55,-78.85 ; C9.1 R17.1 35.326,-69.224 VD4.2
NetC10_1: C10.1 L3.2 | length 7.7
  Top Layer w1: C10.1 26.6,-17.7 L3.2
NetC10_2: C10.2 DD2.1 DD2.2 DD3.2 DD4.2 FU1.2 FV2.2 R18.2 RU1.1 RU3.2 | length 51.1
  Top Layer w2: DD4.2@3.5,-35.9 3.562,-35.796 3.645,-35.655 R18.2 5.115,-28.23 FV2.2 4.1,-24.685 4.1,-23 4.1,-17.8 7.7,-17.8 C10.2@8.99,-19.09 ; C10.2 C10.2@8.99,-19.09 ; RU3.2 19.44,-9.563 13.337,-9.563 12,-10.9 8.99,-10.9 C10.2@8.99,-19.09
  Bottom Layer w2: 3.5,-40.2 DD4.2@3.5,-35.9
NetC17_2: C17.2 DD8.2 ZQ1.3 | length 8.4
  Bottom Layer w0.254: DD8.2 13.34,-92.798 13.542,-93 16.39,-93 16.782,-93.392 16.782,-93.399 ZQ1.3@17.581,-94.198 ; ZQ1.3@17.372,-94.229 ZQ1.3 19.675,-94.229 C17.2@19.707,-94.261
NetC18_2: C18.2 DD8.3 ZQ1.1 | length 10.2
  Bottom Layer w0.254: DD8.3 13.106,-93.448 13.838,-94.18 14.382,-94.18 14.782,-94.579 14.782,-95.124 15.85,-96.192 ZQ1.1@15.85,-96.367 ; ZQ1.1 ZQ1.1@15.85,-96.367 ; C18.2@19.769,-96.611 18.555,-95.397 16.812,-95.397 16.618,-95.592 16.618,-95.599 ZQ1.1@15.85,-96.367
NetC19_2: C19.2 DD8.4 R24.2 XP3.3 | length 24.7
  Top Layer w0.254: v1(14.1,-94.862) 16.138,-96.9 17.985,-96.9 19.26,-98.175 XP3.3
  Bottom Layer w0.254: C19.2 R24.2 5.197,-89.418 8.782,-89.418 9.843,-90.478 9.843,-91.036 10.773,-91.967 10.773,-93.773 11.098,-94.098 DD8.4 13.038,-94.098 13.802,-94.862 v1(14.1,-94.862)
NetDA1_1: DA1.1 R5.2 R7.1 | length 10.5
  Bottom Layer w0.508: R7.1 36.387,-102.812 37.229,-101.971 R5.2@37.229,-96.396 ; DA1.1 36.839,-94.355 37.229,-94.746 R5.2
NetDA1_2: DA1.2 R4.1 R5.1 | length 5.9
  Bottom Layer w0.508: R4.1 34.734,-98.678 34.734,-96.4 35.569,-95.565 DA1.2
NetDA1_5: DA1.5 R9.1 R10.2 | length 37.5
  Top Layer w0.305: v1(31.5,-103.8) 32.2,-104.5 v1(32.9,-104.5)
  Bottom Layer w0.305: R9.1 31.6,-105.8 v1(32.9,-104.5) 32.9,-105.954 33.946,-107 37.2,-107 38.4,-105.8 38.4,-90.266 36.584,-88.45 33.943,-88.45 33.641,-88.148 33.641,-88.141 33.029,-87.528 DA1.5 ; R10.2 30.9,-102.7 31.5,-103.3 v1(31.5,-103.8)
NetDA1_6: DA1.6 R6.2 | length 2.7
  Bottom Layer w0.508: R6.2 34.059,-85.694 34.299,-85.934 DA1.6
NetDA1_7: DA1.7 DD8.6 R6.1 | length 37.5
  Top Layer w0.305: v1(13.9,-96.7) 13.9,-96.06 13.398,-95.558 13.398,-95.16 13.393,-95.155 13.393,-94.569 16.261,-91.7 v1(17.5,-91.7)
  Bottom Layer w0.305: DD8.6 13.408,-95.398 13.9,-95.89 v1(13.9,-96.7) ; v1(17.5,-91.7) 20.15,-89.05 27.327,-89.05 28.995,-87.382 28.995,-84.327 29.922,-83.4 35.015,-83.4 R6.1@36.125,-84.51
  Bottom Layer w0.508: DA1.7 35.569,-86.242 35.611,-86.2 35.655,-86.2 36.059,-85.796 R6.1
NetDA2_1: DA2.1 R18.1 VD3.2 | length 16.8
  Top Layer w1: R18.1 20.155,-32.455 22.15,-34.45 DA2.1
  Bottom Layer w1: R18.1 20.155,-29.805 VD3.2
NetDA2_2: DA2.2 DD3.1 DD4.1 FV2.1 RU1.2 RU2.1 T1.1 VD3.1 XP2.1 | length 87.6
  Top Layer w1: RU1.2 18.222,-15.6 22.5,-15.6 24.58,-13.52 24.58,-5.08 24.5,-5 XP2.1 26.5,-6.8 31.6,-6.8 32.662,-7.862 RU2.1@32.662,-10.61 ; T1.1 21.5,-25.7 FV2.1 14.35,-30.435 14.35,-35.7 18,-35.7 19.25,-36.95 DA2.2
  Top Layer w2: RU1.2 16.61,-19.61 19.085,-22.085 FV2.1
  Bottom Layer w1: DD3.1 DD4.1 20.05,-37.15 VD3.1
NetDD1_6: DD1.6 DD7.15 | length 6
  Bottom Layer w0.254: DD1.6@22.075,-81.5 DD1.6 23.875,-83.95 DD7.15 DD7.15@23.875,-85.85
NetDD1_8: DD1.8 R13.1 | length 15.9
  Top Layer w0.75: DD1.8 16.345,-79.001 17.743,-77.603 17.743,-75.492 20.5,-72.735 v1(20.5,-71.891)
  Bottom Layer w0.75: v1(20.5,-71.891) 20.955,-71.891 22.846,-70 R13.1
NetDD1_9: DD1.9 DD7.13 | length 11.8
  Bottom Layer w0.254: DD1.9 14.042,-81.5 15.542,-83 21.965,-83 22.575,-83.61 DD7.13
NetDD1_10: DD1.10 DD7.17 | length 17.9
  Bottom Layer w0.305: DD1.10 11.265,-82.486 11.669,-82.89 14.514,-82.89 18.815,-87.191 24.684,-87.191 25.175,-86.7 DD7.17
NetDD1_11: DD1.11 DD7.19 | length 22.4
  Bottom Layer w0.305: DD1.11 8.725,-82.785 9.34,-83.4 13.185,-83.4 17.486,-87.701 25.57,-87.701 26.475,-86.796 DD7.19
NetDD2_3: DD2.3 DD2.4 XP2.2 | length 40.7
  Bottom Layer w2: 6.04,-40 6.04,-29.26 12.1,-23.2 12.1,-12.12 XP2.2
NetDD2_7: DD2.7 R19.2 | length 23.3
  Bottom Layer w0.305: DD2.7 4.165,-49.2 5.265,-50.3 13.3,-50.3 14.4,-51.4 14.4,-57.919 13.697,-58.621 12.279,-58.621 R19.2@11.9,-59
NetDD5_3: DD5.3 R20.2 | length 2.5
  Bottom Layer w0.305: R20.2 5.096,-102.902 5.783,-103.589 DD5.3
NetDD6_3: DD6.3 R21.2 | length 20.8
  Top Layer w0.3: v1(0.8,-77.1) 0.956,-77.256 0.956,-80.756 v1(1.9,-81.7)
  Bottom Layer w0.3: v1(0.8,-77.1) 0.8,-70.356 1.125,-70.031 DD6.3 ; v1(1.9,-81.7) 6.616,-81.7 8.029,-83.113 R21.2
NetDD7_2: DD7.2 DD8.8 | length 28
  Top Layer w0.305: v1(25.717,-93.3) 25.54,-93.477 25.746,-93.683 25.744,-93.685 v1(25.744,-97.662)
  Bottom Layer w0.254: 10.85,-98.65 10.85,-96.927 11.079,-96.698 DD8.8
  Bottom Layer w0.305: 10.85,-98.65 12.771,-100.571 25.299,-100.571 25.744,-100.126 v1(25.744,-97.662) ; v1(25.717,-93.3) 26.475,-92.542 DD7.2
NetDD7_4: DD7.4 DD8.7 | length 37.9
  Top Layer w0.305: v1(9.496,-95.669) 9.496,-99.432 13.064,-103 23.447,-103 27.473,-98.974 27.48,-98.974 27.48,-94.063 26.01,-92.593 25.424,-92.593 25.419,-92.598 25.161,-92.598 v1(24.7,-93.059)
  Bottom Layer w0.254: v1(9.496,-95.669) 9.946,-95.669 10.326,-96.048 DD8.7
  Bottom Layer w0.305: v1(24.7,-93.059) 25.175,-92.584 DD7.4
NetDD7_6: DD7.6 DD8.17 | length 43.7
  Top Layer w0.254: v1(8.751,-94.249) 8.751,-97.938 8.78,-97.968 8.788,-97.968 8.982,-98.162 8.982,-100.023 12.444,-103.484 23.655,-103.484 27.964,-99.175 27.964,-92.364 v1(25.5,-89.9)
  Bottom Layer w0.254: DD7.6@23.875,-91.55 23.875,-90.428 24.403,-89.9 v1(25.5,-89.9)
  Bottom Layer w0.305: DD8.17 8.6,-94.098 v1(8.751,-94.249)
NetDD7_8: DD7.8 DD8.18 | length 21
  Top Layer w0.254: v1(9.1,-92) 10.3,-90.8 v1(10.7,-90.8) ; v1(12.7,-90.363) 22.731,-90.363 v1(23.268,-89.827)
  Bottom Layer w0.254: DD8.18 7.552,-93.448 9,-92 v1(9.1,-92) ; v1(10.7,-90.8) 10.7,-91 11.337,-90.363 v1(12.7,-90.363) ; DD7.8 22.575,-90.45 23.198,-89.827 v1(23.268,-89.827) 23.268,-90.078 v1@23.225,-90.121
NetDD8_1: DD8.1 R25.1 | length 4.4
  Bottom Layer w0.254: DD8.1 13.952,-92.148 14.317,-91.783 R25.1
NetDD8_9: DD8.9 R1.1 R2.2 | length 31.8
  Bottom Layer w0.254: DD8.9 12.15,-97.321 13.564,-97.321 14.101,-97.858 23.027,-97.858 25.766,-95.119 26.089,-95.119 ; R1.1@29.087,-95.8 28.407,-95.119 26.089,-95.119 ; R2.2 29.479,-84.55 29.479,-87.786 27.682,-89.584 27.682,-93.526 26.089,-95.119
NetDD8_10: DD8.10 R19.1 | length 42.7
  Top Layer w0.254: v1(12.5,-98.9) 12.5,-93.056 11.382,-91.938 11.382,-88.814 12.444,-87.752 12.444,-80.094 15.197,-77.341 v1(15.197,-72.4)
  Bottom Layer w0.254: R19.1@11.9,-61 12.557,-61 15.168,-63.611 15.168,-72.371 v1(15.197,-72.4) ; DD8.10 12.5,-98.348 v1(12.5,-98.9)
NetDD8_11: DD8.11 R21.1 | length 15.8
  Top Layer w0.3: v1(6.6,-99.3) 6.565,-99.3 6.4,-99.135 6.4,-88.12 v1(7.1,-87.42)
  Bottom Layer w0.3: DD8.11 6.93,-97.998 6.93,-98.767 6.569,-99.129 6.6,-99.161 v1(6.6,-99.3) ; v1(7.1,-87.42) 7.1,-87.401 7.901,-86.6 7.815,-86.514 R21.1
NetDD8_12: DD8.12 R20.1 | length 4.2
  Bottom Layer w0.254: R20.1 4.796,-99.8 4.796,-97.9 5.348,-97.348 DD8.12
NetDD8_13: DD8.13 R22.1 | length 40.3
  Top Layer w0.254: v1(21.8,-108.672) 24.008,-108.672 24.78,-107.9 28.745,-107.9 R22.1
  Bottom Layer w0.254: DD8.13 4.925,-96.698 2.822,-98.801 2.822,-107.354 4.14,-108.672 v1(21.8,-108.672)
NetDD8_14: DD8.14 R1.2 R3.1 R23.1 | length 84.5
  Top Layer w0.254: v1(27.2,-108.6) 27.84,-109.24 31.06,-109.24 R23.1
  Bottom Layer w0.254: DD8.14 4.822,-96.048 2.291,-98.579 2.291,-107.472 4.219,-109.4 26.4,-109.4 v1(27.2,-108.6) 26.59,-107.99 18.866,-107.99 17.8,-106.924 17.8,-104.91 20.362,-102.347 25.5,-102.347 27.168,-100.679 27.168,-98.304 28.257,-97.214 30.024,-97.214 31.087,-96.151 R1.2@31.087,-95.942 ; R1.2 R1.2@31.087,-95.942 ; R1.2@31.087,-95.8 R1.2@31.087,-95.942 ; R3.1 33.639,-100.201 33.639,-97.765 33.447,-97.573 31.634,-97.573 31.634,-96.489 R1.2@31.087,-95.942
NetDD8_19: DD8.19 XP3.5 | length 15.6
  Top Layer w0.254: v1(10.091,-92.268) 11.8,-93.977 11.8,-99.308 12.342,-99.85 13.53,-99.85 XP3.5
  Bottom Layer w0.254: DD8.19 7.357,-92.798 8.418,-91.737 8.418,-91.717 8.912,-91.223 9.38,-91.223 10.091,-91.934 v1(10.091,-92.268)
NetDD8_20: DD8.20 XP3.4 | length 20.1
  Top Layer w0.254: v1(8.5,-90.1) 8.418,-90.182 8.418,-92.282 10.178,-94.043 10.178,-98.335 12.152,-100.309 15.611,-100.309 XP3.4
  Bottom Layer w0.254: DD8.20 6.45,-91.556 7.907,-90.1 v1(8.5,-90.1)
NetFU1_1: FU1.1 XP2.3 | length 16.4
  Top Layer w2: FU1.1@4.1,-7.7 4.1,-2.5 7.3,-2.5 9.6,-4.8 XP2.3
NetHL1_1: HL1.1 R22.2 | length 9.1
  Top Layer w0.305: R22.2 30,-106.2 30.993,-105.207 36.207,-105.207 HL1.1
NetHL2_1: HL2.1 R23.2 | length 2.7
  Top Layer w0.305: R23.2 34.7,-106.2 HL2.1
NetL3_1: L3.1 T1.2 | length 14.5
  Top Layer w1: T1.2 26.5,-23.634 30.288,-19.846 34.354,-19.846 L3.1
NetR3_2: R3.2 VT1.1 | length 7.6
  Bottom Layer w0.254: VT1.1 30.247,-98.041 29.388,-98.9 29.388,-101.288 29.673,-101.573 30.835,-101.573 31.208,-101.945 32.092,-101.945 R3.2
NetR7_2: R7.2 R8.1 VT1.2 XP1.3 | length 24.4
  Bottom Layer w0.305: R8.1 24.151,-103.479 ; XP1.3 24.58,-103.908 24.151,-103.479 ; VT1.2 28,-100.848 26.017,-102.832 24.799,-102.832 24.151,-103.479 ; 29,-104.4 29.107,-104.507 31.793,-104.507 32.508,-103.792 33.193,-103.792 34.2,-104.799 34.2,-105.051 34.971,-105.821 R7.2
  Bottom Layer w0.635: XP1.3 26.18,-104.4 29,-104.4
NetR8_2: R8.2 R9.2 XP1.2 | length 12.9
  Bottom Layer w0.3: XP1.2 21.1,-104.4 R8.2
  Bottom Layer w0.305: XP1.2 19.65,-106 20.749,-107.099 23.165,-107.099 23.424,-107.357 26.488,-107.357 R9.2
VCC3V3: C13.2 C15.1 C16.2 DA3.2 DD5.4 DD6.4 DD7.1 DD8.5 DD8.16 R24.1 XP3.2 | length 95.9
  Top Layer w0.305: v1(15.835,-101.5) 20.044,-101.5 21.8,-99.744 XP3.2 21.8,-96.67 v1(24.384,-94.086)
  Bottom Layer w0.3: DD6.4 4.436,-70.031 DA3.2@6.2,-68.267 ; DD5.4 7.232,-106.5 9.61,-104.121 9.61,-103.59 C15.1
  Bottom Layer w0.305: R24.1 3.015,-92.243 5.52,-94.748 DD8.16 8.041,-94.748 8.295,-95.002 9.032,-95.002 ; DD8.5 9.286,-94.748 9.032,-95.002 ; v1(15.835,-101.5) 15.774,-101.5 14.374,-102.9 C15.1 C16.2 10.3,-97.473 8.789,-95.962 8.789,-95.954 8.725,-95.891 8.725,-95.309 9.032,-95.002 ; v1(24.384,-94.086) 26.121,-94.086 27.125,-93.082 DD7.1 DD7.1@27.125,-91.55
  Bottom Layer w1: R24.1 2.027,-89.6 0.776,-88.349 0.776,-79.331 1.907,-78.2 6.105,-78.2 8.751,-75.554 8.751,-70.818 8.295,-70.362 ; DA3.2@6.2,-61.35 6.2,-67.65 6.2,-68.267 8.295,-70.362 ; C13.2 11.763,-69 9.656,-69 8.295,-70.362
VCC5V0: C11.2 C14.2 DA3.3 DA4.2 DD1.4 DD2.8 DD4.3 DD7.11 DD7.20 R12.1 R15.2 | length 196.1
  Top Layer w0.75: v2(2.957,-50.2) 3.457,-50.7 34.357,-50.7 38.2,-54.543 38.2,-101.045 36.465,-102.78 32.835,-102.78 32.392,-102.337 32.392,-102.24 32.35,-102.198 32.35,-100.122 32.392,-100.08 32.392,-98.56 31.866,-98.034 31.866,-88.456 26.505,-83.095 ; v2(18.721,-84.2) 25.457,-84.2 26.505,-83.152 26.505,-83.095 ; DD1.4 26.505,-83.095
  Bottom Layer w0.305: v2(18.721,-84.2) 20.729,-84.2 21.275,-84.746 DD7.11 ; DD1.4 26.475,-81.53 26.475,-83.4 27.125,-84.05 DD7.20 DD7.20@27.125,-85.85
  Bottom Layer w0.635: DD2.8 2.895,-50.138 v2(2.957,-50.2) 4.674,-51.918 DA4.2@6.9,-51.918
  Bottom Layer w0.75: R15.2 23.2,-77.6 24.525,-78.925 24.56,-78.925 26.225,-80.59 26.225,-81.5 DD1.4
  Bottom Layer w1: DA3.3 3.915,-67.635 3.915,-63.971 3.198,-63.254 C11.2 1.555,-61.135 2.901,-59.789 5.329,-59.789 ; DA4.2@6.9,-51.918 6.9,-53.5 ; C14.2 7.018,-53.618 6.9,-53.5 ; R12.1 14.499,-75.337 13.9,-74.738 13.9,-66.279 11.321,-63.7 DD4.3 9.776,-63.7 8.846,-62.77 8.846,-60.415 8.326,-59.895 8.135,-59.895 8.029,-59.789 5.329,-59.789 ; 5.329,-59.789 6.9,-58.218 6.9,-53.5
VCC12V0: C12.2 DA4.3 DD3.3 R11.1 | length 34.6
  Top Layer w1: v2(2.291,-58.2) 2.309,-58.218 v2(3.3,-58.218) 3.3,-64.233 9.1,-70.033 9.1,-72.359 10.941,-74.2 DD3.3
  Bottom Layer w1: C12.2 4.118,-53.918 4.6,-54.4 DA4.3 4.582,-58.2 4.565,-58.218 v2(3.3,-58.218) 2.309,-58.218 v2(2.291,-58.2) ; R11.1 9.755,-77.17 11.4,-75.526 DD3.3 DD3.3@11.682,-74.482
VCCMAX: C3.1 C5.1 DA1.8 R11.2 R12.2 VD1.2 | length 75.6
  Top Layer w1: VD1.2 30.9,-69.888 30.9,-71.2 31.7,-72 35.063,-72 35.85,-72.787 C3.1 36.804,-75.154 36.804,-99.246 C5.1@34.65,-101.4
  Bottom Layer w0.6: DA1.8 37.453,-86.586
  Bottom Layer w1: R11.2@11.7,-78 12.3,-78.6 R12.2 16.393,-78.6 16.54,-78.453 16.54,-76.112 18.027,-74.625 27.275,-74.625 28.045,-73.855 28.045,-67.033 VD1.2 ; v1(36.8,-81.997) 37.453,-82.65 37.453,-86.586
pads on no net: DD7.3 DD7.5 DD7.7 DD7.9 DD7.12 DD7.14 DD7.16 DD7.18 ZQ1.2 ZQ1.4